# Altium PCB PCB4.PcbDoc
Units mil, origin at the board's own origin, x right, y up, seen from the top; angles counter-clockwise.
Board outline 6000 x 4000 mil, 2 copper layers (Top Layer, Bottom Layer); 73 components, 49 nets, 209 pads, 45 vias.
Unrouted connection lines stored in the file: 1.
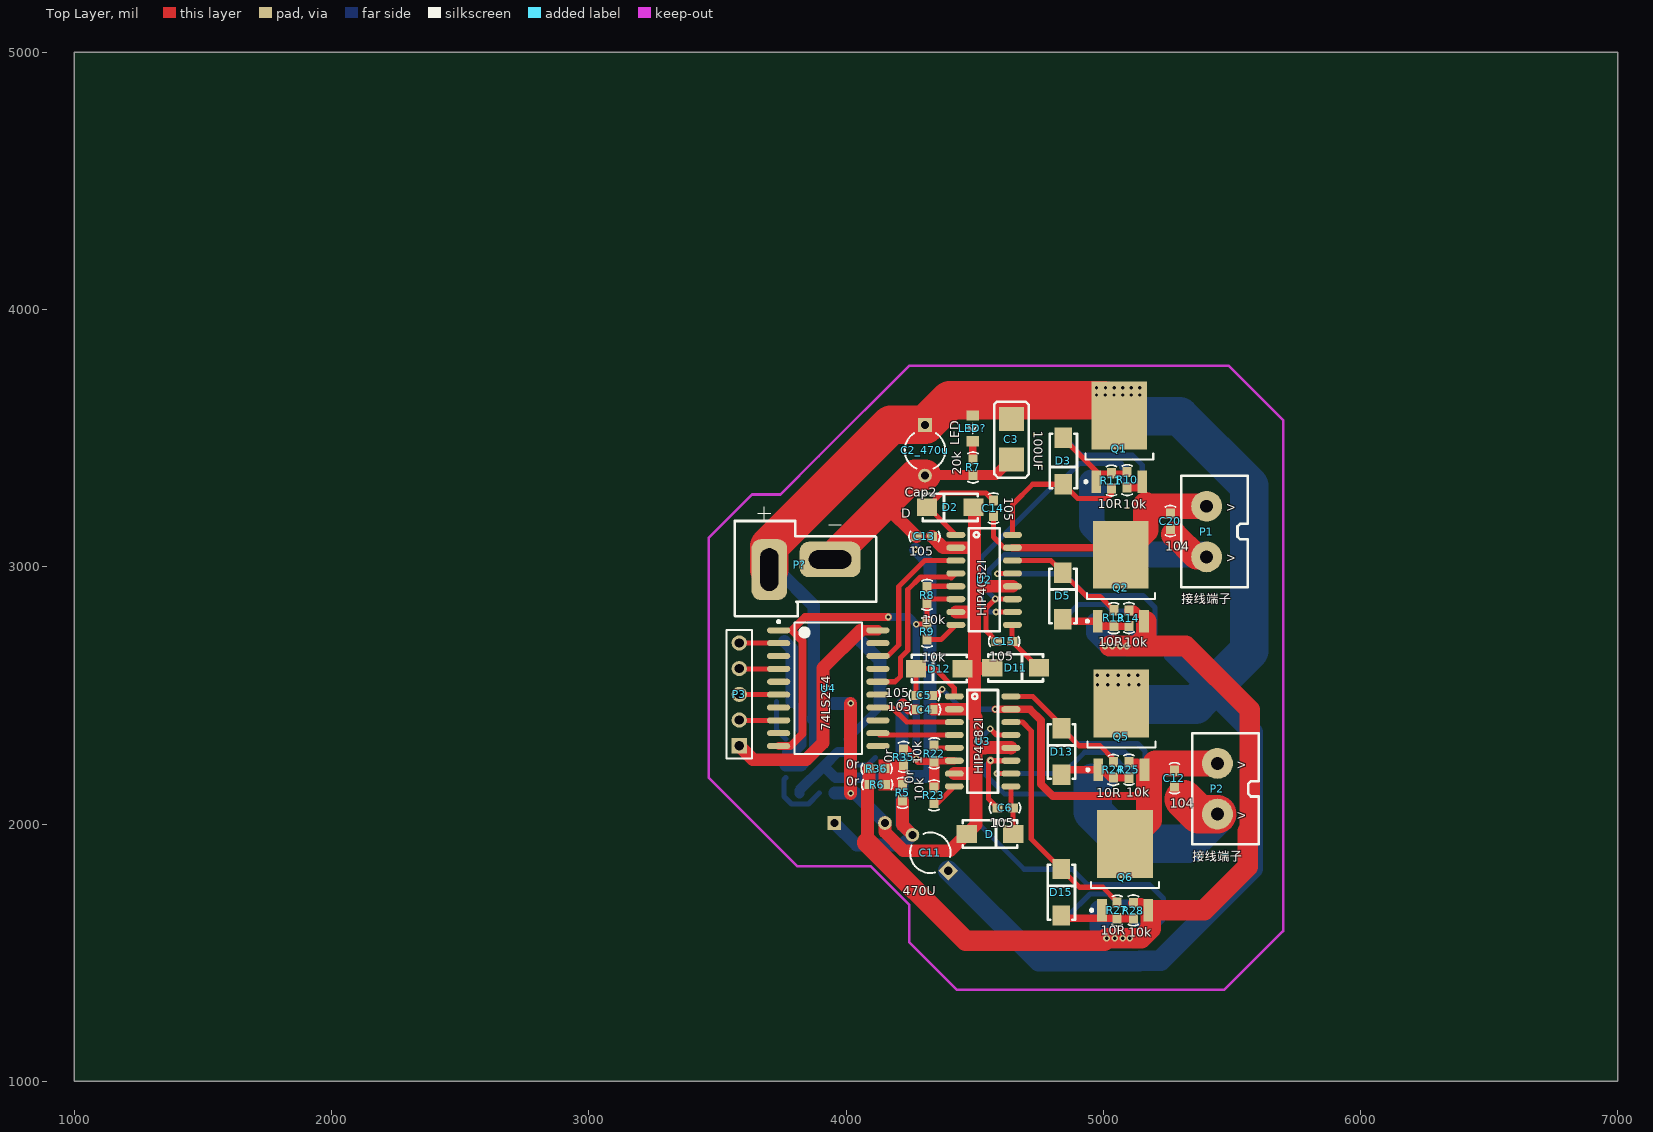
[diagram p0: Top Layer view]
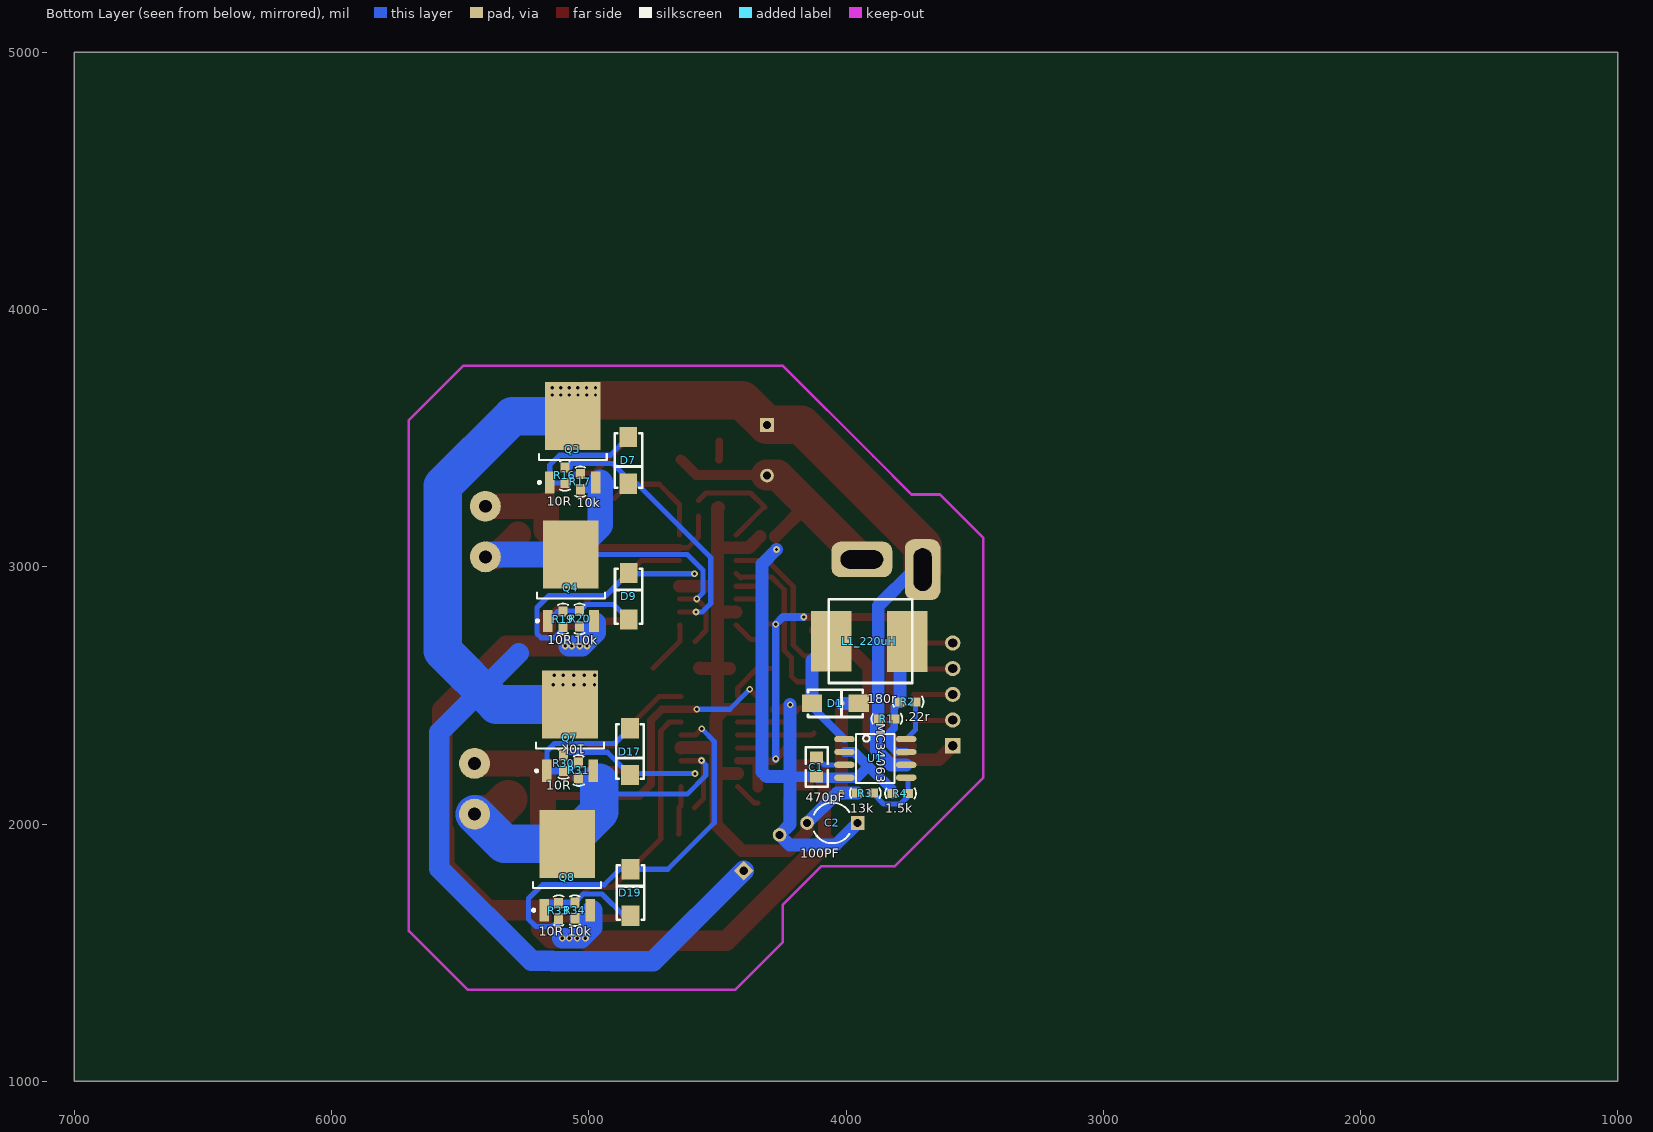
[diagram p1: Bottom Layer view, seen from below]
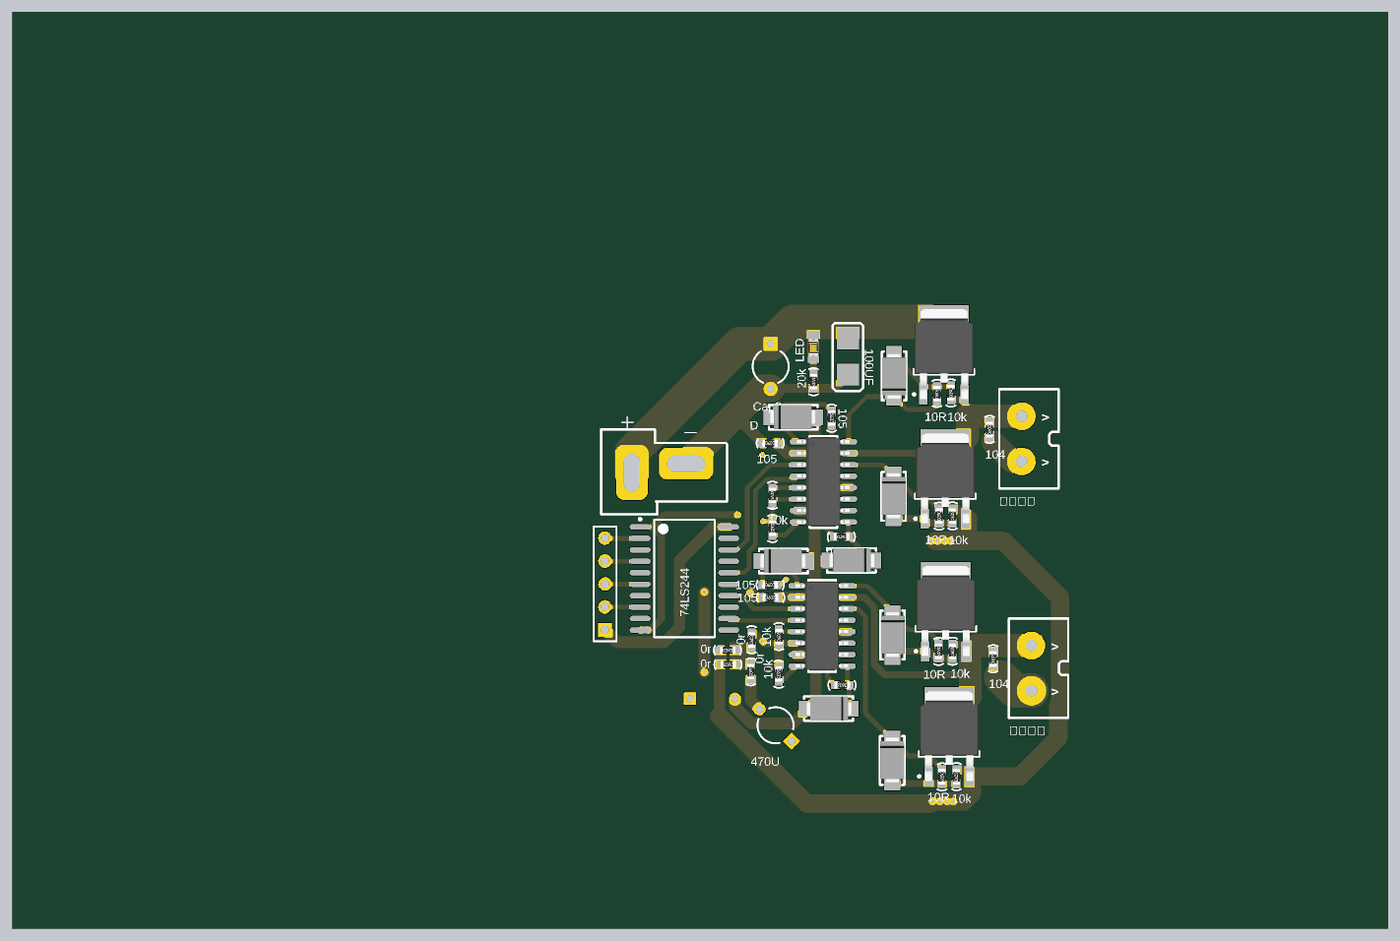
[diagram p2: 3D render of the assembled board from above, using the file's embedded part models]
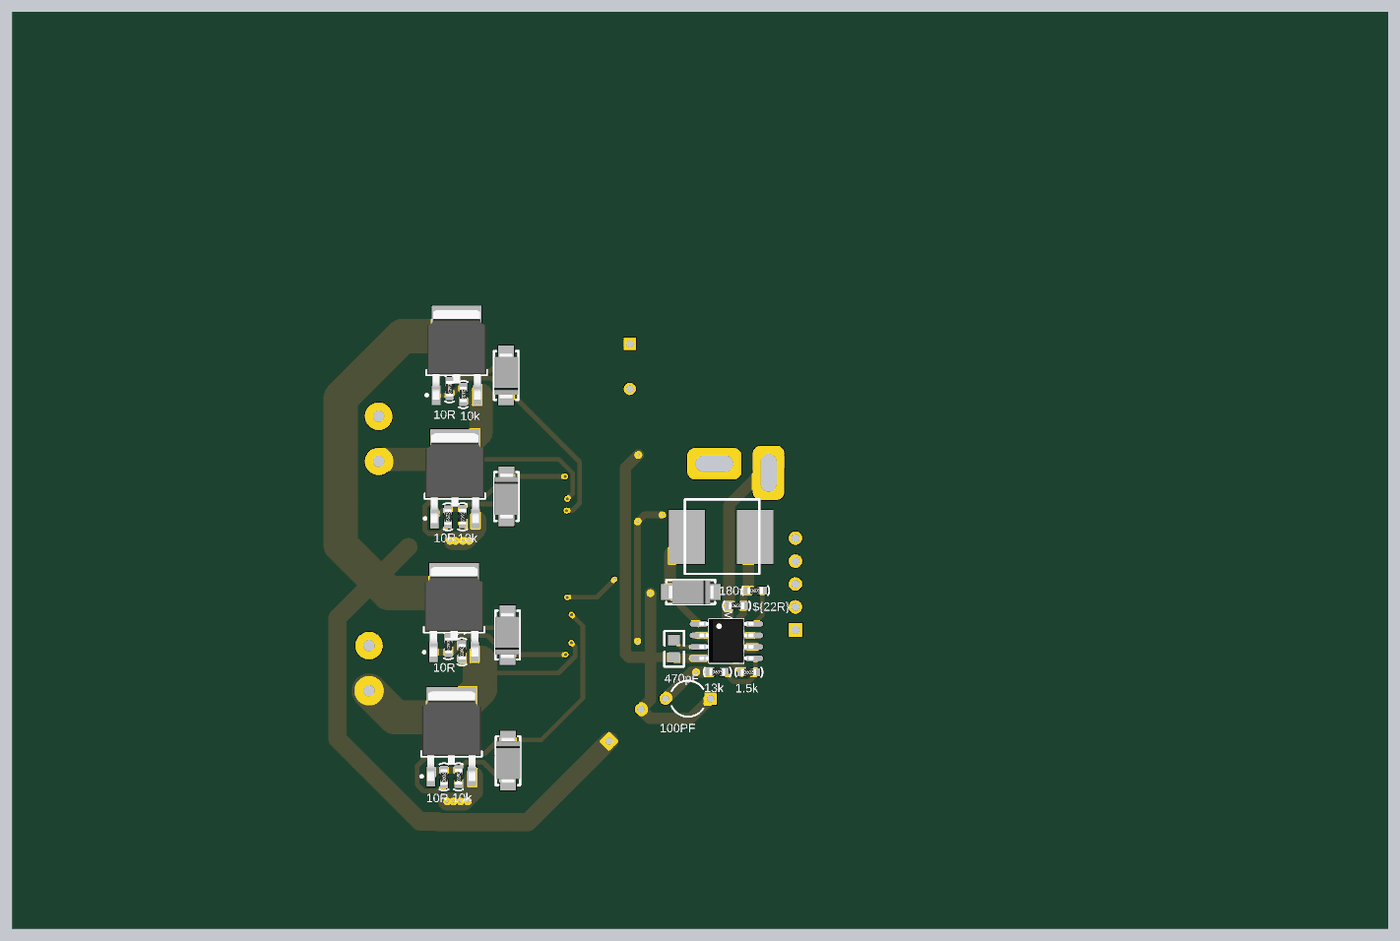
[diagram p3: 3D render of the assembled board from below, using the file's embedded part models]

## Layer stack, top to bottom
Top Solder: solder mask 0.4, Solder Resist, Dk 3.5
Top Layer: signal copper 1.4
Dielectric 1: dielectric 12.6, FR-4, Dk 4.8
Bottom Layer: signal copper 1.4
Bottom Solder: solder mask 0.4, Solder Resist, Dk 3.5

## Board outline
1000,1000 7000,1000 7000,5000 1000,5000

## Design rules (kind name [scope] priority, off if disabled: settings)
Clearance [All] p1: gap=10
PolygonConnect [All] p1: connectstyle=Relief reliefconductorwidth=10 reliefentries=4 polygonreliefangle="90 Angle" airgapwidth=10
RoutingVias [All] p1: holewidth=28 width=50 viastyle="Through Hole" minholewidth=28 minwidth=50 maxholewidth=28 maxwidth=50
SolderMaskExpansion [All] p1: expansion=4
Width [All] p1: maxlimit=150 minlimit=10 preferedwidth=10 minimp=50.000000 maximp=50.000000 favimp=50.000000
30 further rules are at their usual default settings.

## Components (designator, comment, footprint, x,y, rotation, side; value= is the part's Value field where it differs from the comment)
C1 "470pF" 0805 4115,2259 r270 bottom
C2 "100PF" CAPR5-4X5 4053,2004 r0 bottom
C2_470u "Cap2" CAPR5-4X5 4307,3453 r270 top
C3 "100UF" "胆电容 - duplicate" 4643,3496 r270 top
C4 "105" 0603 4301,2445 r0 top
C5 "105" 0603 4299,2500 r0 top
C6 "105" 0603 4624,2063 r180 top
C11 "470U" CAPR5-4X5 4328,1888 r135 top
C12 "104" 0603 5277,2172 r90 top
C13 "105" 0603 4299,3118 r0 top
C14 "105" 0603 4573,3233 r270 top
C15 "105" 0603 4621,2710 r180 top
C20 "104" 0603 5261,3172 r90 top
D "二极管" 二极管 4564,1961 r0 top
D1 "二极管" 二极管 4037,2469 r180 bottom
D2 "D" 二极管 4401,3231 r180 top
D3 "二极管" 二极管 4845,3407 r270 top
D5 "二极管" 二极管 4843,2891 r90 top
D7 "二极管" 二极管 4846,3409 r270 bottom
D9 "二极管" 二极管 4845,2890 r90 bottom
D11 "二极管" 二极管 4664,2607 r0 top
D12 "二极管" 二极管 4358,2604 r180 top
D13 "二极管" 二极管 4838,2286 r90 top
D15 "二极管" 二极管 4837,1739 r90 top
D17 "二极管" 二极管 4840,2277 r270 bottom
D19 "二极管" 二极管 4838,1738 r90 bottom
L1_220uH "Inductor" 电感8*8 3761,2709 r270 bottom
LED? "LED" LED(0805) 4493,3538 r270 top
P1 "接线端子" 接线端子 5297,2917 r90 top
P2 "接线端子" 接线端子 5339,1917 r90 top
P3 "Header 5" HDR1X5 3585,2304 r90 top
P? "电源接线端子" T型接头 3807,3019 r0 top
Q1 "" "TO-252  mos管" 5062.51,3503.81 r90 top
Q2 "" "TO-252  mos管" 5068.51,2961.81 r90 top
Q3 "" "TO-252  mos管" 5062,3501 r90 bottom
Q4 "" "TO-252  mos管" 5069.51,2962.81 r90 bottom
Q5 "" "TO-252  mos管" 5070.51,2383.81 r90 top
Q6 "" "TO-252  mos管" 5085,1838 r90 top
Q7 "" "TO-252  mos管" 5073,2380 r90 bottom
Q8 "" "TO-252  mos管" 5084,1838 r90 bottom
R1 ".22r" 0603 3847,2409 r180 bottom
R2 "180r" 0603 3765,2475 r180 bottom
R3 "13k" 0603 3931,2120 r180 bottom
R4 "1.5k" 0603 3794,2119 r180 bottom
R5 "0r" 0603 4220,2127 r270 top
R6 "0r" 0603 4127,2153 r180 top
R7 "20k" 0603 4494,3392 r270 top
R8 "10k" 0603 4315,2885 r90 top
R9 "10k" 0603 4315,2752 r270 top
R10 "10k" 0603 5093,3343 r270 top
R11 "10R" 0603 5032,3329 r90 top
R13 "10R" 0603 5041,2806 r270 top
R14 "10k" 0603 5100,2795 r90 top
R16 "10R" 0603 5093,3361 r270 bottom
R17 "10k" 0603 5033,3336 r270 bottom
R19 "10R" 0603 5100,2791 r90 bottom
R20 "10k" 0603 5036,2803 r270 bottom
R22 "10k" 0603 4343,2269 r90 top
R23 "10k" 0603 4342,2117 r270 top
R24 "10R" 0603 5039,2216 r270 top
R25 "10k" 0603 5100,2205 r90 top
R27 "10R" 0603 5054,1669 r270 top
R28 "10k" 0603 5117,1658 r90 top
R30 "10R" 0603 5098,2241 r270 bottom
R31 "10k" 0603 5039,2214 r270 bottom
R33 "10R" 0603 5117,1657 r90 bottom
R34 "10k" 0603 5054,1669 r270 bottom
R35 "0r" 0603 4224,2255 r90 top
R36 "0r" 0603 4125,2215 r180 top
U1 "MC34063" SO8NB 3886,2255 r270 bottom
U2 "HIP4082I" HIP4082I 4537,2964 r0 top
U3 "HIP4082I" HIP4082I 4531,2336 r0 top
U4 "74LS244" 74LS244D 3931,2528 r0 top

## Footprints (in the part's own frame and the unit in brackets; to place one, negate y for a bottom-side part, rotate by r counter-clockwise, add the part's x,y. Pads: shape width x height; smd on the part's side, far side on the other; paste and mask are expansions set on the pad)
74LS244D [mm] "SOP-20"
  oval 2.3x0.6 smd: 1(-4.9,5.715) 2(-4.9,4.445) 3(-4.9,3.175) 4(-4.9,1.905) 5(-4.9,0.635) 6(-4.9,-0.635) 7(-4.9,-1.905) 8(-4.9,-3.175) 9(-4.9,-4.445) 10(-4.9,-5.715) 11(4.9,-5.715) 12(4.9,-4.445) 13(4.9,-3.175) 14(4.9,-1.905) 15(4.9,-0.635) 16(4.9,0.635) 17(4.9,1.905) 18(4.9,3.175) 19(4.9,4.445) 20(4.9,5.715)
  silkscreen extent -5.02,-6.5 3.35,6.69, body extent -3.8,-6.5 3.8,6.5, height 2.65
0603 [mil]
  rect 40x35 smd: 1(-25,0) 2(35,0)
  silkscreen extent -54,-20 66,20, body extent -28,-16 38,16, height 22
0805 [mil]
  rect 45x50 smd: 1(0,0) 2(75,0)
  silkscreen extent -40,-41 115,44
CAPR5-4X5 [mm] "Capacitor; 2 Leads"
  rect 1.35x1.35 hole 0.8: 1(-2.5,0)
  round 1.35 hole 0.8: 2(2.5,0)
  silkscreen extent -1.69,-2 1.82,2
HDR1X5 [mm] "Connector; Header; 5 Position"
  rect 1.5x1.5 hole 0.9: 1(0,0)
  round 1.5 hole 0.9: 2(2.54,0) 3(5.08,0) 4(7.62,0) 5(10.16,0)
  silkscreen extent -1.27,-1.27 11.43,1.27
HIP4082I [mil]
  oval 74x24 smd: 1(-110,160) 2(-110,110) 3(-110,60) 4(-110,10) 5(-110,-40) 6(-110,-90) 7(-110,-140) 8(-110,-190) 9(110,-190) 10(110,-140) 11(110,-90) 12(110,-40) 13(110,10) 14(110,60) 15(110,110) 16(110,160)
  silkscreen extent -60,-215 60,185, body extent -115,-207 113,179, height 69
LED(0805) [mil]
  rect 40x50 smd: 1(-50,0) 2(50,0)
  silkscreen extent -20,-20 20,20, body extent -37,-24 43,25, height 43
SO8NB [mil]
  oval 24x80 smd: 1(-75,-120) 2(-25,-120) 3(25,-120) 4(75,-120) 5(75,120) 6(25,120) 7(-25,120) 8(-75,120)
  silkscreen extent -95,-75 95,75, body extent -97,-118 96,118, height 61
"TO-252  mos管" [mm]
  rect 2.2x0.95 smd: 1(-4.4,2.28) 3(-4.4,-2.28)
  rect 6.7x5.5 smd: 2(2.15,0)
  silkscreen extent -4.52,-3.35 -1.6,3.43, body extent -4.9,-3.27 5.04,3.27, height 2.39
T型接头 [mm]
  rrect50% 3.5x6 hole 1.8 slot 4.2 at 90 deg: 1(-2.667,-0.762)
  rrect50% 6x3.5 hole 1.8 slot 4.2 at 0 deg: 2(3.333,0.238)
  silkscreen extent -6.07,-5.36 7.87,5.46
二极管 [mm] "SS-14/M7"
  rect 2x1.75 smd: 1(-2.413,0) 2(2.187,0)
  silkscreen extent -2.81,-1.35 2.59,1.35, body extent -2.61,-1.34 2.49,1.33, height 2.12
接线端子 [mil]
  round 120 hole 50: 1(121.57,-105) 2(318.43,-105)
  silkscreen extent 3,-265 437,-7
电感8*8 [mm]
  rect 6x4 smd: 1(0,0) 2(-0.025,-7.544)
  silkscreen extent -4.17,-7.77 4.09,0.48
"胆电容 - duplicate" [mm]
  rect 2.4x2.45 smd: 1(-2,0) 2(2,0)
  silkscreen extent -3.71,-1.68 3.81,1.7

## Part data
C1: library part Cap, "Capacitor"
C2 C11: library part Cap2, "Capacitor"
C2_470u: "Capacitor"
C3: library part "Cap Pol1", "Polarized Capacitor (Radial)"
C4 C5 C6 C12 C13 C14 C15 C20: library part Cap, "无极电容"
D2: library part 二极管
LED?: "发光二极管"
P3: "Header, 5-Pin"
P?: "电源线"
Q1 Q2 Q3 Q4 Q5 Q6 Q7 Q8: library part NMOS-2, "N-Channel Power MOSFET"
R1 R2 R3 R4 R5 R6 R7 R8 R9 R10 R11 R13 R14 R16 R17 R19 R20 R22 R23 R24 R25 R27 R28 R30 R31 R33 R34 R35 R36: library part R

## Via types
v1: diameter 26, hole 13, Top Layer to Bottom Layer, 45 vias

## Nets (pads, with @x,y where several pads share a name; then routed paths per layer and width w, separated by ;. In a path a pad name is that pad's centre, name@x,y a point inside that pad or via, vN(x,y) a via of type N, cw(c..) or ccw(c..) an arc to the next point about the centre after c; other vN are vias at no path point)
5V: P3.1 U4.20 | length 940.1
  Top Layer w40: 4057,2753 U4.20
  Top Layer w50: P3.1 3639,2250 3845,2250 3910,2315 3910,2606 4057,2753
12V: C2.2 C4.2 C13.2 D1.2 D2.1 D11.1 D12.1 D.1 R3.1 U2.2 U2.7 U2.12 U3.2 U3.7 U3.12 | length 3271.7
  Top Layer w50: v1(4018,2119) v1(4018,2469) ; C2.2 4151.43,1968.57 4223.98,1896.02 4404.02,1896.02 D.1 4505,1997 4505,2197 ; C13.2 4378,3074 U2.2 4494,3074 ; C4.2@4337,2446 U3.2 4474,2446 4499,2421 ; U3.7 4504,2196 4505,2197 ; U2.7 4497,2824 4499,2826 ; D12.1 4499,2604 ; D2.1 4499,3228 4499,2919 ; D11.1 4566,2604 4499,2604 ; U3.12 4641,2297 4541.29,2297 4540.29,2296 4505,2296 ; U2.12 4504,2924 4499,2919 ; 4499,2421 4499,2604 ; 4499,2421 4505,2415 4505,2296 ; 4499,2604 4499,2826 ; 4499,2826 4499,2919 ; 4505,2197 4505,2296
  Bottom Layer w50: D1.2 v1(4018,2469) ; R3.1 4035.43,2120 C2.2
AGND: C1.2 C2.1 C2_470u.2 C3.2 C4.1 C11.2 C13.1 P?.2 R4.1 R5.2 R7.2 U1.2 U1.4 | length 3727.3
  Top Layer w40: v1@4220.78,2467.78 4243.57,2445 C4.1 ; C2_470u.2@4309.43,3357 R7.2 4582.74,3357 C3.2
  Top Layer w50: 4154.92,3245.08 4154.92,3237.08 C13.1 ; R5.2 4220,1996 C11.2
  Top Layer w120: P?.2 4154.92,3245.08 4266.85,3357 C2_470u.2@4309.43,3357
  Bottom Layer w40: R4.1 3819,2130.4 3913.8,2225.2 ; U1.2 3968.6,2280 3913.8,2225.2 ; 4217,2179 4212,2184 C1.2 4111,2180 U1.4 3959,2180 3913.8,2225.2
  Bottom Layer w50: C2.1 4040.57,1918 4218.81,1918 C11.2 4217,1999 4217,2179 ; 4212,2184 4217,2184 ; v1(4217,2464) 4217,2184 ; v1(4270,3067) 4326,3011 4326,2202 4308,2184 4217,2184
DGND: R8.1 R9.1 R22.1 R23.1 R35.2 U2.6 U3.6 U4.1 U4.10 | length 2137.1
  Top Layer w20: v1(4273,2777) R9.1 R8.1 4329,2874 U2.6 ; R23.1 R23.1@4343,2143
  Top Layer w30: U4.10 3783,2303 3831,2351 3831,2711 3789,2753 3841,2805 v1(4164,2805) ; R35.2 4236.86,2290 4273,2253.86 v1(4273,2253) 4282,2244 R22.1 4343,2246 U3.6
  Top Layer w40: R23.1@4343,2143 R22.1
  Bottom Layer w30: v1(4164,2805) 4245,2805 v1(4273,2777) v1(4273,2253)
GND: R5.1 R6.1 R35.1 R36.1 | length 210.9
  Top Layer w30: R36.1 4152,2213 R6.1 4153,2152 R5.1 4224,2156 R35.1
NetC1_1: C1.1 U1.3 | length 121
  Bottom Layer w20: U1.3 4086,2230 C1.1
NetC5_1: C5.1 D12.2 U3.1 | length 318
  Top Layer w20: C5.1 4271.9,2502.1 D12.2 4346,2604 4421,2529 U3.1
NetC5_2: C5.2 C12.2 P2.2 Q5.3 Q6.2 R25.2 U3.15 | length 1814.7
  Top Layer w20: C5.2 4350,2500 v1(4374,2524)
  Top Layer w30: v1(4580,2446) U3.15 4715,2446 4758,2403 4758,2155 4804,2109 5176.5,2109 ; R25.2 5130.86,2240 Q5.3
  Top Layer w50: C12.2@5273.65,2210.35 C12.2
  Top Layer w100: Q6.2 5177.5,2015.15 Q5.3@5177.5,2210.58 ; 5202.34,2235.43 P2.2
  Bottom Layer w20: v1(4374,2524) 4452,2446 v1(4580,2446)
NetC6_1: C6.1 D.2 U3.9 | length 188.8
  Top Layer w20: U3.9 4641,2071 C6.1 4649,1962.1 D.2
NetC6_2: C6.2 C12.1 P2.1 Q7.3 Q8.2 R31.2 U3.11 | length 1659.5
  Top Layer w20: v1(4562,2247) 4554,2239 4554,2098 C6.2 ; v1@4563,2246 U3.11
  Top Layer w30: v1(4562,2247) v1@4563,2246
  Top Layer w150: 5312.5,2097 5370.93,2038.57 P2.1
  Bottom Layer w20: v1(4562,2247) 4545,2230 4545,2188 4617,2116 4945.9,2116
  Bottom Layer w50: 5011.01,2179 R31.2
  Bottom Layer w150: 4959.45,2160.84 4959.45,2047.2 Q8.2 5328.07,1922.65 P2.1
NetC14_1: C14.1 D2.2 U2.1 | length 449.7
  Top Layer w20: U2.1 4320,3231 D2.2 4370.9,3287 4544,3287 C14.1
NetC14_2: C14.2 C20.2 P1.2 Q1.3 Q2.2 R10.2 U2.15 | length 1077.8
  Top Layer w20: C14.2 4573,3116 4615,3074 U2.15
  Top Layer w30: U2.15 Q2.2@5040.97,3074 ; R10.2 5129.69,3308
  Top Layer w100: Q2.2 5165.11,3143.05 5165.11,3241 5170.68,3235.43 P1.2
NetC15_1: C15.1 D11.2 U2.9 | length 211.2
  Top Layer w20: U2.9 4646,2773 C15.1 4749,2607 D11.2
NetC15_2: C15.2 C20.1 P1.1 Q3.3 Q4.2 R17.2 U2.11 | length 1823.5
  Top Layer w20: C15.2 4544,2752 4544,2839 v1(4580,2875) 4581,2874 U2.11
  Top Layer w100: 5275.11,3125.43 5361.96,3038.57 P1.1
  Bottom Layer w20: v1(4580,2875) 4556,2899 4556,2986.67 4616.79,3047.46 Q4.2
  Bottom Layer w30: Q3.3 4999.01,3301 R17.2
  Bottom Layer w100: Q3.3@4955.5,3327.77 4955.5,3161.47 Q4.2 5393.12,3047.46 P1.1
NetD1_1: D1.1 L1_220uH.2 U1.1 | length 462.8
  Bottom Layer w30: U1.1 4132,2456 D1.1
  Bottom Layer w50: L1_220uH.2 4132,2636 D1.1
NetD3_1: D3.1 Q1.1 R10.1 R11.2 | length 334.7
  Top Layer w20: D3.1 4845,3499 4980,3364 R11.2 5089,3364 R10.1 ; Q1.1 Q1.1@4972.75,3356.75
NetD3_2: D3.2 R11.1 U2.16 | length 587.3
  Top Layer w20: U2.16 4647,3242 4725.9,3320.9 D3.2 4900.9,3265 5014,3265 5032,3283 R11.1
NetD5_1: D5.1 Q2.1 R13.2 R14.1 | length 267.8
  Top Layer w30: D5.1 4850.42,2788.58 Q2.1 4997.33,2770 R14.1
NetD5_2: D5.2 R13.1 U2.14 | length 473.9
  Top Layer w20: U2.14 4796.1,3024 D5.2 4935.1,2885 4987,2885 R13.1
NetD7_1: D7.1 Q3.1 R16.2 R17.1 | length 552.3
  Bottom Layer w20: D7.1 4916.24,3433.76 5113.24,3433.76 5151.76,3395.24 Q3.1 5149.99,3326 R16.2 5087.22,3326 5052.22,3361 R17.1
NetD7_2: D7.2 R16.1 U2.10 | length 1056.9
  Top Layer w20: v1(4583,2824) U2.10
  Bottom Layer w20: v1(4583,2824) 4559,2824 4526,2857 4526,3036 4812.9,3322.9 D7.2 4846,3340 4907,3401 5070.5,3401 5070.5,3386 R16.1
NetD9_1: D9.1 Q4.1 R19.2 R20.1 | length 364.5
  Bottom Layer w20: D9.1 4902.89,2852.89 5011.11,2852.89 R20.1 5098,2828 R19.2 5122.86,2826 Q4.1
NetD9_2: D9.2 R19.1 U2.13 | length 958.6
  Top Layer w20: v1(4589,2973) 4590,2974 U2.13
  Bottom Layer w20: v1(4589,2973) 4841.9,2973 D9.2 4933.1,2888 5155,2888 5201,2842 5201,2740 5185,2724 5134.57,2724 5100,2758.57 R19.1
NetD13_1: D13.1 Q5.1 R24.2 R25.1 | length 282.8
  Top Layer w30: D13.1 4857.58,2210.58 Q5.1 4996.56,2210.58 5027.14,2180 R25.1
NetD13_2: D13.2 R24.1 U3.16 | length 513.4
  Top Layer w20: U3.16 4726,2496 ; 4729,2493 4838,2384 D13.2 4906.1,2304 4988,2304 5039,2253 R24.1
NetD15_1: D15.1 Q6.1 R27.2 R28.1 | length 313.6
  Top Layer w30: D15.1 4847,1634 R27.2 5055,1633 R28.1 ; Q6.1@4995.24,1635.76 Q6.1
NetD15_2: D15.2 R27.1 U3.14 | length 952.1
  Top Layer w20: U3.14 4686,2396 4720,2362 4720,1942.1 D15.2 4908.1,1754 4998,1754 5054,1698 R27.1
NetD17_1: D17.1 Q7.1 R30.2 R31.1 | length 575.1
  Bottom Layer w20: D17.1 4899.24,2312.76 5133.24,2312.76 5162.76,2283.24 Q7.1
  Bottom Layer w30: R31.1 5055.5,2239 5055.5,2235.64 5084.37,2206.77 Q7.1
NetD17_2: D17.2 R30.1 U3.10 | length 609
  Top Layer w20: v1(4587,2196) U3.10
  Bottom Layer w20: v1(4587,2196) 4834.9,2196 D17.2 4928.1,2279 5085,2279 R30.1
NetD19_1: D19.1 Q8.1 R33.2 R34.1 | length 398
  Bottom Layer w20: D19.1 4863,1643 4948.08,1728.08 5021.22,1728.08 5054,1695.3 R34.1
  Bottom Layer w30: R34.1 5056,1692 R33.2 5146.54,1692 Q8.1
NetD19_2: D19.2 R33.1 U3.13 | length 1549.2
  Top Layer w20: v1(4561,2370) 4585,2346 U3.13
  Bottom Layer w20: v1(4561,2370) 4512,2321 4512,2005 4692.9,1824.1 D19.2 4879.9,1824.1 4940,1764 5180,1764 5234,1710 5234,1630 5205.46,1601.46 5142.39,1601.46 5127.85,1616 5118.78,1616 5117,1617.78 R33.1
NetL1_220uH_1: L1_220uH.1 R1.2 R2.1 U1.7 | length 507.2
  Bottom Layer w30: U1.7 3804,2280 3831,2307 3831,2354 3812,2373 R1.2 3812,2453 R2.1
  Bottom Layer w50: L1_220uH.1 3790,2680 R2.1
NetLED?_2: LED?.2 R7.1 | length 71.4
  Top Layer w30: LED?.2 4493,3418 R7.1
NetR2_2: R2.2 U1.8 | length 159.9
  Bottom Layer w20: R2.2 3730,2366 U1.8
NetR3_2: R3.2 R4.2 U1.5 | length 242.3
  Bottom Layer w20: U1.5 3759,2173 R4.2 3759,2107 3788,2078 3854,2078 R3.2
NetR8_2: R8.2 U2.5 | length 113.7
  Top Layer w20: R8.2 4319,2924 U2.5
NetR9_2: R9.2 U2.8 | length 135.6
  Top Layer w20: R9.2 4370,2717 U2.8
NetR22_2: R22.2 U3.5 | length 81.3
  Top Layer w20: R22.2 4351,2296 U3.5
NetR23_2: R23.2 U3.8 | length 105.5
  Top Layer w20: R23.2 4357,2082 U3.8
PGND: Q2.3 Q4.3 Q6.3 Q8.3 R6.2 R14.2 R20.2 R28.2 R34.2 R36.2 | length 4108.9
  Top Layer w40: R14.2 5119.93,2830 5158.28,2791.65 Q2.3 ; R28.2 5146.54,1693 Q6.3
  Top Layer w50: 4083,1928 4083,2144 R6.2 ; R6.2@4090,2155 R36.2
  Top Layer w80: 4083,1928 4465,1546 5003,1546 v1(5013,1556) v1(5045,1556) v1(5076,1556) v1(5103,1556) 5148.21,1556 5184.5,1592.29 5184.5,1664.77 5391.77,1664.77 5561,1834 5561,1970.8 5569,1978.8 5569,2444 5321,2692 5130.21,2692 ; v1@5025,2692 v1(5035,2692) v1(5066,2692) v1(5091,2692) 5130.21,2692 ; Q2.3@5167.5,2788.58 5167.5,2729.29 5130.21,2692
  Bottom Layer w40: Q4.3 5001.33,2768 R20.2 ; Q8.3 5025.01,1634 R34.2
  Bottom Layer w80: Q4.3@4972.98,2782.81 4972.98,2744.02 5025,2692 v1(5035,2692) v1(5066,2692) v1@5078,2692 ; Q8.3@4986.5,1664.77 4986.5,1598.5 5029,1556 v1(5045,1556) v1(5076,1556) v1(5103,1556)
  other v1: 5007,2692
PWM1: P3.5 U4.2 | length 152.1
  Top Layer w20: P3.5@3586,2703 U4.2
PWM2: P3.4 U4.4 | length 153.5
  Top Layer w20: P3.4 3586,2603 U4.4
PWM3: P3.3 U4.6 | length 153.5
  Top Layer w20: P3.3 3586,2503 U4.6
PWM4: P3.2 U4.8 | length 153.5
  Top Layer w20: P3.2 3586,2403 U4.8
PWMOUT1: U2.3 U4.18 | length 589.7
  Top Layer w20: U4.18 4162,2653 4205,2696 4205,2923 4306,3024 U2.3
PWMOUT2: U2.4 U4.16 | length 664
  Top Layer w20: U4.16 4191,2553 4212.53,2574.53 4212.53,2646.73 4240,2674.21 4240,2910.78 4289.22,2960 4409,2960 4409,2956 U2.4
PWMOUT3: U3.3 U4.14 | length 320.7
  Top Layer w20: U4.14 4179,2453 4236,2396 U3.3
PWMOUT4: U3.4 U4.12 | length 300
  Top Layer w20: U4.12 4130.91,2346 U3.4
VCC: C2_470u.1 C3.1 C11.1 LED?.1 P?.1 Q1.2 Q3.2 Q5.2 Q7.2 R1.1 U1.6 | length 6852.2
  Top Layer w150: P?.1 3702,3079.19 4174.24,3551.43 C2_470u.1 4402.57,3647 Q1.2@5003.97,3647
  Bottom Layer w50: P?.1 3734,2989 3874.74,2848.26 3874.74,2411.74 R1.1 3881,2409 3881,2286.29 3824.71,2230 U1.6
  Bottom Layer w80: C11.1 4750,1466 5140.28,1466 5143.28,1469 5223,1469 5581,1827 5581,2356 5272.68,2664.32
  Bottom Layer w150: Q3.2 5296.35,3585.65 5567,3315 5567,2673 5358.65,2464.65 Q7.2
  other v1: 4978,2541 5018,2541 5058,2541 5100,2541 5138,2541 4977,2578 5017,2578 5058,2578 5099,2578 5134,2578 4974,3668 5008,3668 5042,3668 5076,3668 5109,3668 5142,3668 4974,3696 5009,3696 5043,3696 5076,3696 5109,3696 5142,3696
pads on no net: U4.3 U4.5 U4.7 U4.9 U4.11 U4.13 U4.15 U4.17 U4.19

## Keep-outs
Keep-Out Layer:
  lines w10: 3466,2180 3810,1836 4095,1836 4246,1685 4246,1540 4431,1355 5470,1355 5699,1584 5699,3570 5487,3782 4246,3782 3894,3430 3745,3281 3635,3281 3466,3112 3466,2180

## Other copper
Top Layer:
  rectangle net GND: 4127,2130 4236,2250

## Text inside footprints (layer, text, board x,y; h text height)
P1: Top Overlay "V" at 5520.11,3018.89 h50 r90; Top Overlay "V" at 5520.11,3215.74 h50 r90
P2: Top Overlay "V" at 5562.11,2018.89 h50 r90; Top Overlay "V" at 5562.11,2215.74 h50 r90